# Altium PCB GCC.PcbDoc
Units mm, origin at the board's own origin, x right, y up, seen from the top; angles counter-clockwise.
Board outline 12 x 12 mm, 2 copper layers (Top Layer, Bottom Layer), stack 0.173 mm thick; 36 components, 27 nets, 120 pads, 33 vias.
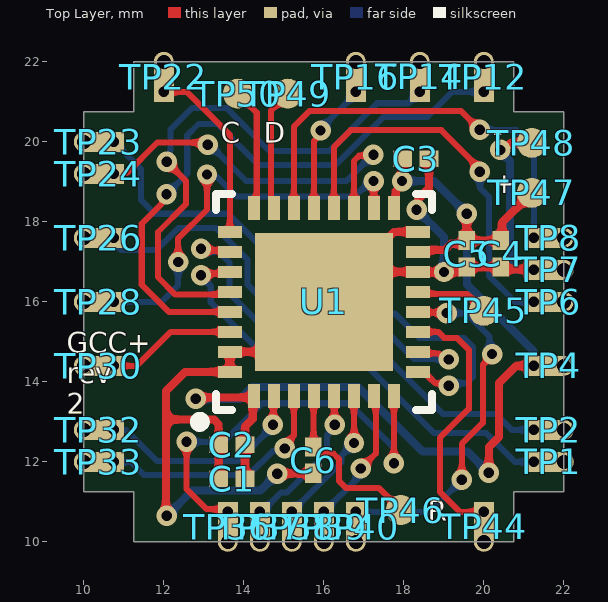
[diagram p0: Top Layer view]
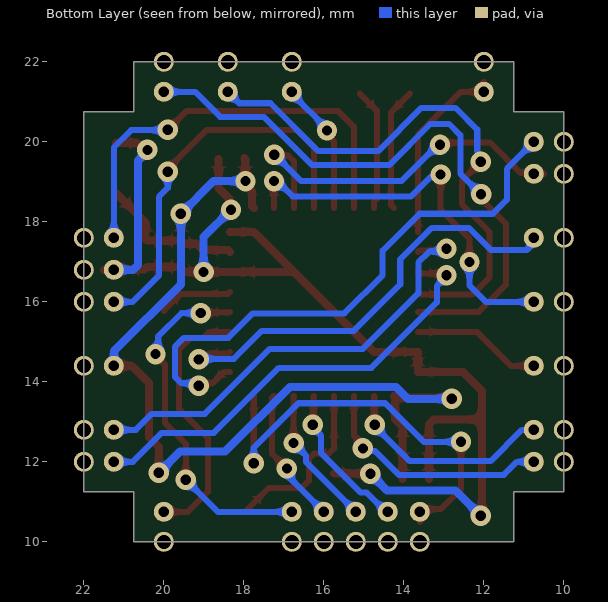
[diagram p1: Bottom Layer view, seen from below]

## Layer stack, top to bottom
Top Solder: solder mask 0.0254, Solder Resist, Dk 3.5
Top Layer: signal copper 0.0356
Dielectric 1: dielectric 0.102, FR-4, Dk 4.8
Bottom Layer: signal copper 0.0356
Bottom Solder: solder mask 0.0254, Solder Resist, Dk 3.5

## Board outline
10,11.25 10,20.75 11.25,20.75 11.25,22 20.75,22 20.75,20.75 22,20.75 22,11.25 20.75,11.25 20.75,10 11.25,10 11.25,11.25

## Design rules (kind name [scope] priority, off if disabled: settings)
BoardOutlineClearance [All] p1: gap=0.381 ignorepadtopadclearanceinfootprint=FALSE
Clearance [All] p1: gap=0.152 ignorepadtopadclearanceinfootprint=FALSE except(0: Arc-Hole Track-Hole SMDPad-Hole THPad-Hole Via-Hole Fill-Hole Poly-Hole Region-Hole Text-Hole)
ComponentClearance [All] p1: gap=0.025 collisioncheckmode=3 verticalgap=0.025 showdistances=FALSE
DiffPairsRouting [All] p1: maxlimit=10 minlimit=0.152 mostfreqgap=0.203 toplayer_minwidth=0.152 toplayer_maxwidth=0.381 toplayer_prefwidth=0.203 bottomlayer_minwidth=0.152 bottomlayer_maxwidth=0.381 bottomlayer_prefwidth=0.203 maxuncoupledlength=12.7
HoleSize [All] p1: absolutevalues=TRUE maxlimit=6.731 minlimit=0.254 maxpercent=80.000 minpercent=20.000
HoleToHoleClearance [All] p1: gap=0.254 allowstackedmicrovias=FALSE
MinimumAnnularRing [All] p1: minimumring=0.127
MinimumSolderMaskSliver [All] p1: minsoldermaskwidth=0
PlaneClearance [All] p1: clearance=0.254
PlaneConnect [All] p1: planeconnectstyle=Direct reliefexpansion=0.406 reliefentries=4 reliefconductorwidth=0.152 reliefairgap=0.152
PolygonConnect [All] p1: connectstyle=Direct reliefconductorwidth=0.203 reliefentries=4 polygonreliefangle="90 Angle" airgapwidth=0.152
RoutingCorners [All] p1: cornerstyle=45-Degree minsetback=1.25 maxsetback=1.25
RoutingVias [All] p1: holewidth=0.254 width=0.508 viastyle="Through Hole" minholewidth=0.254 minwidth=0.508 maxholewidth=2.54 maxwidth=2.896
SilkToSilkClearance [All] p1: silktosilkclearance=0
SilkToSolderMaskClearance [IsPad] p1: minsilkscreentomaskgap=0.152 clearancetoexposedcopper=TRUE
SolderMaskExpansion SolderMaskExpansion_1 [All] p1: expansion=0.102 istentingtop=FALSE
SolderMaskExpansion TentedVias [isVia] p2: expansion=0.075 istentingtop=TRUE
Width [All] p1: maxlimit=10.16 minlimit=0.152 preferedwidth=0.152 minimp=50.000000 maximp=50.000000 favimp=50.000000
20 further rules are at their usual default settings.

## Components (designator, comment, footprint, x,y, rotation, side; value= is the part's Value field where it differs from the comment)
C1 "Capacitor" CAPC0603X03N 13.7,11.575 r0 top value=4.7uF
C2 "Capacitor" CAPC0603X03N 13.7,12.425 r0 top value=0.1uF
C3 "Capacitor" CAPC0603X03N 18.3,19.575 r180 top value=0.1uF
C4 "Capacitor" CAPC0603X03N 20.425,17.2 r90 top value=1uF
C5 "Capacitor" CAPC0603X03N 19.575,17.2 r90 top value=10nF
C6 "Capacitor" CAPC0603X03N 15.738,12.042 r90 top value=0.1uF
TP1 "Test Point" TP_RECTANGULAR_0.5X1MM_CAST 21.5,12 r270 top
TP2 "Test Point" TP_RECTANGULAR_0.5X1MM_CAST 21.5,12.8 r270 top
TP4 "Test Point" TP_RECTANGULAR_0.5X1MM_CAST 21.5,14.4 r270 top
TP6 "Test Point" TP_RECTANGULAR_0.5X1MM_CAST 21.5,16 r270 top
TP7 "Test Point" TP_RECTANGULAR_0.5X1MM_CAST 21.5,16.8 r270 top
TP8 "Test Point" TP_RECTANGULAR_0.5X1MM_CAST 21.5,17.6 r270 top
TP12 "Test Point" TP_RECTANGULAR_0.5X1MM_CAST 20,21.5 r0 top
TP14 "Test Point" TP_RECTANGULAR_0.5X1MM_CAST 18.4,21.5 r0 top
TP16 "Test Point" TP_RECTANGULAR_0.5X1MM_CAST 16.8,21.5 r0 top
TP22 "Test Point" TP_RECTANGULAR_0.5X1MM_CAST 12,21.5 r0 top
TP23 "Test Point" TP_RECTANGULAR_0.5X1MM_CAST 10.5,20 r90 top
TP24 "Test Point" TP_RECTANGULAR_0.5X1MM_CAST 10.5,19.2 r90 top
TP26 "Test Point" TP_RECTANGULAR_0.5X1MM_CAST 10.5,17.6 r90 top
TP28 "Test Point" TP_RECTANGULAR_0.5X1MM_CAST 10.5,16 r90 top
TP30 "Test Point" TP_RECTANGULAR_0.5X1MM_CAST 10.5,14.4 r90 top
TP32 "Test Point" TP_RECTANGULAR_0.5X1MM_CAST 10.5,12.8 r90 top
TP33 "Test Point" TP_RECTANGULAR_0.5X1MM_CAST 10.5,12 r90 top
TP36 "Test Point" TP_RECTANGULAR_0.5X1MM_CAST 13.6,10.5 r180 top
TP37 "Test Point" TP_RECTANGULAR_0.5X1MM_CAST 14.4,10.5 r180 top
TP38 "Test Point" TP_RECTANGULAR_0.5X1MM_CAST 15.2,10.5 r180 top
TP39 "Test Point" TP_RECTANGULAR_0.5X1MM_CAST 16,10.5 r180 top
TP40 "Test Point" TP_RECTANGULAR_0.5X1MM_CAST 16.8,10.5 r180 top
TP44 "Test Point" TP_RECTANGULAR_0.5X1MM_CAST 20,10.5 r180 top
TP45 "Test Point" TP_CIRCULAR_SMD_0.75MM 20,15.775 r90 top
TP46 "Test Point" TP_CIRCULAR_SMD_0.75MM 17.925,10.795 r90 top
TP47 "Test Point" TP_CIRCULAR_SMD_0.75MM 21.2,18.725 r90 top
TP48 "Test Point" TP_CIRCULAR_SMD_0.75MM 21.2,19.975 r90 top
TP49 "Test Point" TP_CIRCULAR_SMD_0.75MM 15.1,21.205 r90 top
TP50 "Test Point" TP_CIRCULAR_SMD_0.75MM 13.85,21.205 r90 top
U1 "STM32G431KBU6" QFN50P500X500X60_HS-33N 16,16 r90 top

## Footprints (in the part's own frame and the unit in brackets; to place one, negate y for a bottom-side part, rotate by r counter-clockwise, add the part's x,y. Pads: shape width x height; smd on the part's side, far side on the other; paste and mask are expansions set on the pad)
CAPC0603X03N [mm] "Chip Capacitor, 2-Leads, Body 0.60x0.30mm, IPC Medium Density"
  rect 0.48x0.42 smd: 1(-0.33,0) 2(0.33,0)
  body extent -0.31,-0.16 0.32,0.17, height 0.33
QFN50P500X500X60_HS-33N [mm] "QFN, 32-Leads, Body 5.00x5.00mm, Pitch 0.50mm, Thermal Pad 3.45x3.45mm, IPC Medium Density"
  rect 0.6x0.3 smd: 1(-2.35,1.75) 2(-2.35,1.25) 3(-2.35,0.75) 4(-2.35,0.25) 5(-2.35,-0.25) 6(-2.35,-0.75) 7(-2.35,-1.25) 8(-2.35,-1.75) 17(2.35,-1.75) 18(2.35,-1.25) 19(2.35,-0.75) 20(2.35,-0.25) 21(2.35,0.25) 22(2.35,0.75) 23(2.35,1.25) 24(2.35,1.75)
  rect 0.3x0.6 smd: 9(-1.75,-2.35) 10(-1.25,-2.35) 11(-0.75,-2.35) 12(-0.25,-2.35) 13(0.25,-2.35) 14(0.75,-2.35) 15(1.25,-2.35) 16(1.75,-2.35) 25(1.75,2.35) 26(1.25,2.35) 27(0.75,2.35) 28(0.25,2.35) 29(-0.25,2.35) 30(-0.75,2.35) 31(-1.25,2.35) 32(-1.75,2.35)
  rect 3.45x3.45 smd: 33(0,0)
  silkscreen extent -3.12,-2.7 2.7,3.22, body extent -2.55,-2.55 2.55,2.55, height 0.6
TP_CIRCULAR_SMD_0.75MM [mm]
  round 0.75 smd: 1(0,0)
TP_RECTANGULAR_0.5X1MM_CAST [mm]
  round 0.5 hole 0.35 paste+0 mask+0: 1(0,0.5)
  rect 0.5x1 smd mask+0.05: 1(0,0)
  round 0.5 hole 0.254 paste+0 mask+0: 1(0,-0.25)

## Part data
C1: "General purpose capacitor", Package=0201, Rated Voltage=6.3V
C2 C3 C4 C5 C6: "General purpose capacitor", Package=0201, Rated Voltage=50V
TP1 TP2 TP4 TP6 TP7 TP8 TP12 TP14 TP16 TP22 TP23 TP24 TP26 TP28 TP30 TP32 TP33 TP36 TP37 TP38 TP39 TP40 TP44 TP45 TP46 TP47 TP48 TP49 TP50: "General purpose test point"
U1: "MCU 32-Bit ARM Cortex-M4 RISC 128KB Flash 1.71V to 3.6V 32-Pin UFQFPN", Manufacturer=STMicroelectronics, Manufacturer Part Number=STM32G431KBU6, Pricing 1="1=4.44000, 10=3.99100, 25=3.77320, 100=3.27000, 250=3.10228, 500=2.78366, 1000=2.34766, 2500=2.23028, 5000=2.14643 (USD)", RoHS=No, Stock 1=2759, Supplier 1=Digi-Key

## Via types
v1: diameter 0.508, hole 0.254, Top Layer to Bottom Layer, tented both sides, 33 vias

## Nets (pads, with @x,y where several pads share a name; then routed paths per layer and width w, separated by ;. In a path a pad name is that pad's centre, name@x,y a point inside that pad or via, vN(x,y) a via of type N, cw(c..) or ccw(c..) an arc to the next point about the centre after c; other vN are vias at no path point)
3V3: C1.2 C2.2 C3.2 C4.2 C5.2 TP4.1 TP47.1 U1.1 U1.15 U1.17 | length 27.5
  Top Layer w0.203: v1(12.8,13.575) 12.838,13.613 U1.1@14.212,13.613 ; C1.2 C2.2 14.03,12.883 14.222,13.075 14.222,13.582 14.202,13.602 U1.1@14.212,13.613 ; U1.1 U1.1@14.212,13.613 ; U1.17 17.798,18.398 17.798,18.775 17.957,18.934 v1(17.957,19.017) 17.964,19.023 17.964,19.569 C3.2@17.988,19.593 ; U1.15 18.398,17.298 19.026,17.298 19.179,17.452 19.497,17.452 C5.2 ; v1(19.575,18.2) C5.2 ; v1(20.125,11.725) 20.125,12.375 20.375,12.625 20.375,13.975 20.8,14.4 TP4.1@21.25,14.4 ; TP47.1 21.194,18.725 20.456,17.987 20.456,17.561 C4.2 C5.2
  Bottom Layer w0.203: v1(12.8,13.575) 13.9,13.575 14.2,13.875 16.85,13.875 18.471,12.254 19.596,12.254 v1(20.125,11.725) ; v1(17.957,19.017) 18.758,19.017 v1(19.575,18.2) 19.575,16.436 21.241,14.77 21.241,14.409 TP4.1@21.25,14.4
A: TP2.1 U1.26 | length 11.4
  Top Layer w0.152: v1(12.931,17.325) 12.969,17.288 13.612,17.288 U1.26
  Bottom Layer w0.152: v1(12.931,17.325) 12.999,17.257 13.364,17.257 13.637,16.984 13.637,16.213 15.025,14.825 17.35,14.825 18.975,13.2 20.3,13.2 20.7,12.8 TP2.1@21.25,12.8
B: TP1.1 U1.27 | length 11.3
  Top Layer w0.152: v1(12.931,16.665) 12.974,16.707 13.607,16.707 U1.27
  Bottom Layer w0.152: v1(12.931,16.665) 12.931,16.64 13.174,16.398 13.174,15.987 14.811,14.35 17.125,14.35 18.752,12.723 20.052,12.723 20.775,12 TP1.1@21.25,12
C_STICK_X: TP39.1 U1.7 | length 3.5
  Top Layer w0.152: v1(16.924,11.833) 17.3,12.208 17.3,13.6 U1.7
  Bottom Layer w0.152: TP39.1@16,10.75 16.856,11.606 16.856,11.765 v1(16.924,11.833)
C_STICK_Y: TP40.1 U1.12 | length 9
  Top Layer w0.152: U1.12 18.366,15.734 19.059,15.734 v1(19.075,15.717) ; v1(19.45,11.55) 19.45,12.45 19.975,12.975 19.975,14.426 20.208,14.659 v1(20.208,14.693)
  Bottom Layer w0.152: TP40.1@16.8,10.75 18.65,10.75 v1(19.45,11.55) ; v1(19.075,15.717) 19.558,15.717 20.14,15.135 20.14,14.761 v1(20.208,14.693)
D_DOWN: TP28.1 U1.18 | length 10.1
  Top Layer w0.152: v1(12.359,16.995) 12.359,17.587 13.08,18.307 v1(13.08,19.182) ; v1(17.246,19.017) 17.248,19.015 17.248,18.352 U1.18
  Bottom Layer w0.152: TP28.1@10.75,16 11.95,16 12.359,16.409 v1(12.359,16.995) ; v1(13.08,19.182) 13.148,19.114 13.337,19.114 13.816,18.634 16.778,18.634 17.161,19.017 v1(17.246,19.017)
D_LEFT: TP23.1 U1.9 | length 14.3
  Top Layer w0.152: U1.9 18.5,14.25 18.782,13.968 19.057,13.968 v1(19.125,13.9)
  Bottom Layer w0.152: TP23.1@10.75,20 11.425,19.325 11.425,18.55 11.773,18.202 13.606,18.202 14.53,17.277 14.53,16.67 15.487,15.713 17.772,15.713 18.384,15.1 19.5,15.1 19.725,14.875 19.725,14.125 19.568,13.968 19.193,13.968 v1(19.125,13.9)
D_RIGHT: TP26.1 U1.10 | length 11.4
  Top Layer w0.152: U1.10 18.389,14.711 18.879,14.711 19.029,14.56 v1(19.125,14.56)
  Bottom Layer w0.152: TP26.1@10.625,17.6 10.925,17.3 11.821,17.3 12.371,17.85 13.3,17.85 14.09,17.06 14.09,16.435 15.25,15.275 17.55,15.275 18.25,14.575 19.11,14.575 v1(19.125,14.56)
D_UP: TP24.1 U1.19 | length 9.4
  Top Layer w0.152: TP24.1@10.5,19.2 TP24.1@10.674,19.374 ; TP24.1@10.75,19.2 10.782,19.232 11.09,19.232 11.841,19.983 13.042,19.983 v1(13.097,19.928) ; U1.19 16.75,19.52 16.884,19.654 17.214,19.654 v1(17.238,19.677)
  Bottom Layer w0.152: v1(13.097,19.928) 13.152,19.928 14.054,19.025 16.572,19.025 17.224,19.677 v1(17.238,19.677)
DATA: TP16.1 U1.21 | length 3.3
  Top Layer w0.152: U1.21 15.75,20.017 15.919,20.187 v1(15.919,20.283)
  Bottom Layer w0.152: v1(15.919,20.283) 15.919,20.326 16.8,21.207 TP16.1@16.8,21.25
DBG: TP45.1 U1.13 | length 1.8
  Top Layer w0.152: U1.13 18.4,16.2 19.575,16.2 TP45.1
GND: C1.1 C2.1 C3.1 C4.1 C5.1 C6.1 TP7.1 TP48.1 U1.14 U1.16 U1.31 U1.32 U1.33 | length 30.4
  Top Layer w0.203: v1(12.075,10.65) 12.05,10.675 12.05,13.057 ; C1.1 C2.1 13.37,12.938 13.251,13.057 12.05,13.057 ; v1(14.836,11.704) 14.84,11.708 15.734,11.708 C6.1 ; U1.16 17.75,17.75 U1.33@16.75,16.75 ; 18.35,18.562 18.63,18.842 C3.1 ; v1@20.495,19.799 20.67,19.975 TP48.1 ; TP7.1@21.5,16.8 21.25,16.8 21.239,16.811 20.484,16.811 C4.1 C5.1 19.575,16.852 19.467,16.744 18.356,16.744 U1.14 U1.33@16.75,16.75 ; 12.05,13.057 12.05,13.775 12.525,14.25 U1.32 U1.31 14.75,14.75 U1.33 U1.33@16.75,16.75
  Bottom Layer w0.203: v1(12.075,10.65) 12.711,11.286 14.419,11.286 v1(14.836,11.704) ; v1(18.319,18.303) 19.006,17.616 v1(19.006,16.744) ; v1(20.412,19.799) 20.412,19.761 20.65,19.523 20.65,16.919 20.769,16.8 TP7.1@21.25,16.8
JOYSTICK_X: TP37.1 U1.5 | length 3.8
  Top Layer w0.152: U1.5 16.262,13.638 16.262,12.938 v1(16.275,12.925)
  Bottom Layer w0.152: TP37.1@14.4,10.75 14.45,10.75 14.929,11.229 15.078,11.229 16.075,12.226 16.075,12.658 16.275,12.858 v1(16.275,12.925)
JOYSTICK_Y: TP38.1 U1.6 | length 3.5
  Top Layer w0.152: U1.6 16.754,13.646 16.754,13.128 16.758,13.125 16.758,12.474 v1(16.754,12.471)
  Bottom Layer w0.152: TP38.1@15.2,10.75 16.442,11.992 16.442,12.158 v1(16.754,12.471)
L: TP22.1 U1.25 | length 4.7
  Top Layer w0.152: TP22.1@12,21.25 12.575,21.25 13.65,20.175 U1.25 ; TP22.1@12,21.5 TP22.1@12.1,21.4
L_ANALOG: TP36.1 U1.8 | length 10.7
  Top Layer w0.152: v1(12.571,12.5) 12.571,11.319 13.073,10.817 13.533,10.817 TP36.1@13.6,10.75 ; TP36.1@13.5,10.6 TP36.1@13.6,10.5 ; v1@17.751,11.965 U1.8@17.751,13.649
  Bottom Layer w0.152: v1(12.571,12.5) 13.5,12.5 14.464,13.464 16.636,13.464 17.752,12.348 v1(17.752,11.964)
OSC_IN: TP32.1 U1.2 | length 5.4
  Top Layer w0.152: v1(14.727,12.927) 14.739,12.938 14.739,13.639 U1.2
  Bottom Layer w0.152: TP32.1@10.75,12.8 11.05,12.8 11.832,12.018 13.857,12.018 14.727,12.888 v1(14.727,12.927)
OSC_OUT: TP33.1 U1.3 | length 6.1
  Top Layer w0.152: v1(15.024,12.337) 15.024,12.433 15.25,12.659 U1.3
  Bottom Layer w0.152: TP33.1@10.75,12 11.175,12 11.5,11.675 14.125,11.675 14.719,12.269 14.956,12.269 v1(15.024,12.337)
R: TP8.1 U1.22 | length 10.8
  Top Layer w0.152: U1.22 15.25,20.376 ; 15.251,20.376 15.64,20.765 19.435,20.765 v1(19.9,20.3)
  Bottom Layer w0.152: v1(19.9,20.3) 19.907,20.293 20.815,20.293 21.25,19.857 TP8.1@21.25,17.6
R_ANALOG: TP44.1 U1.11 | length 6.6
  Top Layer w0.152: U1.11 18.86,15.25 19.01,15.1 19.325,15.1 19.625,14.8 19.625,13.325 18.9,12.6 18.9,11.25 19.4,10.75 TP44.1@20,10.75
RESET_N: C6.2 TP46.1 U1.4 | length 4.5
  Top Layer w0.152: U1.4 15.744,13.644 15.744,12.378 C6.2 15.738,12.342 15.872,12.208 16.242,12.208 16.375,12.075 16.375,11.525 16.55,11.35 17.37,11.35 TP46.1
START: TP30.1 U1.30 | length 3.3
  Top Layer w0.152: TP30.1@10.75,14.4 11.325,14.4 12.175,15.25 U1.30
SWCLK: TP50.1 U1.24 | length 3.1
  Top Layer w0.152: TP50.1 14.324,20.731 14.324,18.424 U1.24
SWDIO: TP49.1 U1.23 | length 3.1
  Top Layer w0.152: U1.23 14.75,18.5 14.676,18.574 14.676,18.662 14.675,18.663 14.675,20.78 TP49.1
X: TP14.1 U1.28 | length 13.7
  Top Layer w0.152: v1(12.075,19.5) 12.55,19.025 12.55,18.441 11.855,17.746 11.855,16.616 12.288,16.182 13.582,16.182 U1.28
  Bottom Layer w0.152: v1(12.075,19.5) 12.143,19.568 12.143,19.745 12.165,19.767 12.165,20.307 12.708,20.85 13.562,20.85 14.642,19.77 16.138,19.77 17.333,20.965 18.115,20.965 TP14.1@18.4,21.25
Y: TP12.1 U1.29 | length 15.4
  Top Layer w0.152: v1(12.067,18.689) 12.067,18.593 11.938,18.464 11.938,18.441 11.448,17.951 11.448,16.428 12.126,15.75 U1.29
  Bottom Layer w0.152: v1(12.067,18.689) 12.585,19.207 12.585,20.165 12.867,20.446 13.341,20.446 14.368,19.419 16.29,19.419 17.497,20.625 18.59,20.625 19.215,21.25 TP12.1@20,21.25
Z: TP6.1 U1.20 | length 9.9
  Top Layer w0.152: U1.20 16.25,19.868 16.674,20.292 18.935,20.292 19.9,19.327 v1(19.9,19.25)
  Bottom Layer w0.152: v1(19.9,19.25) 19.9,18.85 20.125,18.625 20.125,16.655 20.78,16 TP6.1@21.25,16

## Silkscreen, mask and mechanical layers (free items; w line width, h text height)
Top Overlay:
  text "-" at 20.227,19.998 h0.51
  text "C" at 13.427,19.977 h0.51
  text "D" at 14.502,19.977 h0.51
  text "+" at 20.227,18.717 h0.51
  text "GCC+ / rev / 2" at 9.578,13.2 h0.51
  text "R" at 18.602,10.527 h0.51
Mechanical 1:
  the board outline again, w0.01